# EAGLE board IRBeaconRev5 (EAGLE 6.4)
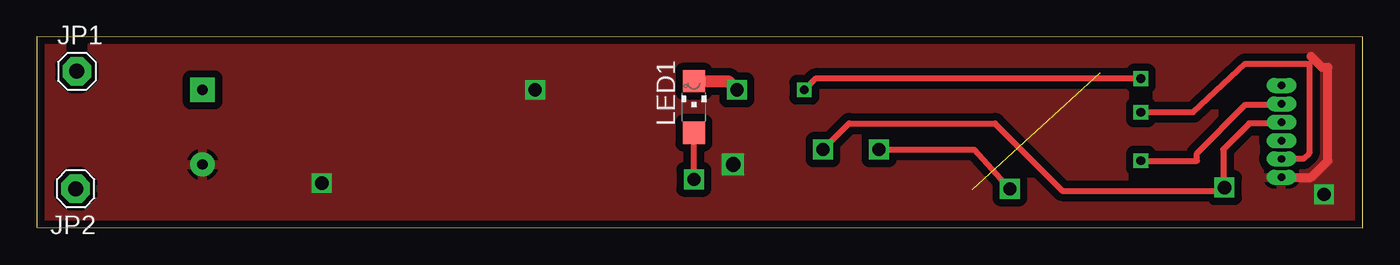
[diagram p0: board, top side]
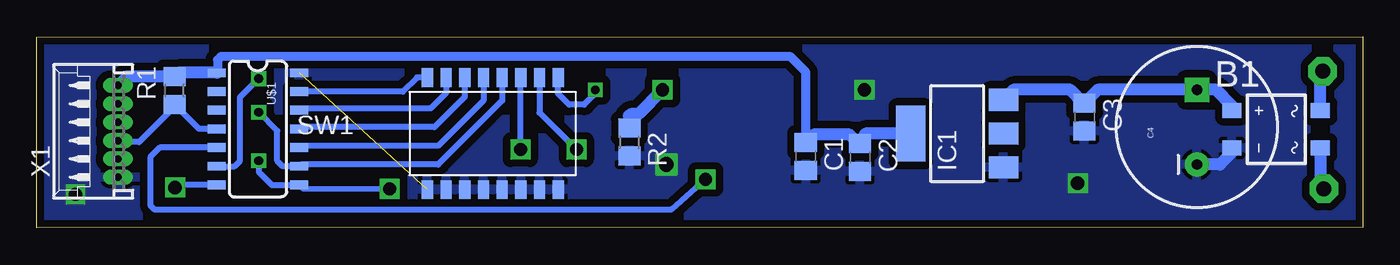
[diagram p1: board, bottom side, seen from below]

Size 90.05 x 13.01 mm. Coordinates in mm from the lower left corner, seen from the top.
Outline: 0,0.04 90.05,0 90.05,12.97 0,13.01 0,0.04
Copper layers (1*16): Top 0.035mm / dielectric 1.5mm / Bottom 0.035mm
Design rules "default *": minimum track width 10mil, minimum drill 24mil, track to track 8mil, track to pad 8mil, pad to pad 8mil, via to via 8mil, smd to smd 8mil, copper to edge 20mil, drill to drill 8mil, minimum pad ring 10mil, minimum via ring 8mil, stop-mask expansion 4mil, vias tented up to drill 0mil, thermal gap 10mil
Net classes: 0 default: width 0.508 mm, drill 0.508 mm, clearance 0.508 mm

## Footprints (pad centres in the part's own frame; a part is rotated, then mirrored left to right if it is on the bottom)
MBS = smd 1 x 1.3: + -1.27,-3; - 1.27,-3; AC1 -1.27,3; AC2 1.27,3
C0805 = smd 1.3 x 1.5: 1 -0.95,0; 2 0.95,0
CPOL-RADIAL-1000UF-25V = drill 0.7 pad 1.651 square: 1 2.54,0 | drill 0.7 pad 1.651: 2 -2.54,0
SOT223 = smd 1.5 x 2: 1 -2.3,-3.15; 2 0,-3.15; 3 2.3,-3.15 | smd 3.8 x 2: 4 0,3.15
1X01 = drill 1.016 pad 1.93 octagon: 1 0,0
CHIPLED_1206 = smd 1.5 x 1.5: A 0,-1.75; C 0,1.75
R0805 = smd 1.3 x 1.5: 1 -0.95,0; 2 0.95,0
416131160808 = smd 0.76 x 1.27: 1 0,-3.81; 2 1.27,-3.81; 3 2.54,-3.81; 4 3.81,-3.81; 5 5.08,-3.81; 6 6.35,-3.81; 7 7.62,-3.81; 8 8.89,-3.81; 9 8.89,3.81; 10 7.62,3.81; 11 6.35,3.81; 12 5.08,3.81; 13 3.81,3.81; 14 2.54,3.81; 15 1.27,3.81; 16 0,3.81
SO14 = smd 0.6 x 1.2: 1 -3.81,-2.8; 2 -2.54,-2.8; 3 -1.27,-2.8; 4 0,-2.8; 5 1.27,-2.8; 6 2.54,-2.8; 7 3.81,-2.8; 8 3.81,2.8; 9 2.54,2.8; 10 1.27,2.8; 11 0,2.8; 12 -1.27,2.8; 13 -2.54,2.8; 14 -3.81,2.8
53048-06 = drill 0.5 pad 0.698 long: 1 3.125,-1.25; 2 1.875,-1.25; 3 0.625,-1.25; 4 -0.625,-1.25; 5 -1.875,-1.25; 6 -3.125,-1.25

## Placement (x,y rotation side)
B1  B2S  [MBS]  5.88,6.72 270 bottom
C1  0.1uF  [C0805]  37.83,4.86 270 bottom
C2  10uF  [C0805]  34.14,4.79 270 bottom
C3  0.1uF  [C0805]  18.89,7.54 270 bottom
C4  [CPOL-RADIAL-1000UF-25V]  11.26,6.86 90 bottom
IC1  LD117AS33TR  [SOT223]  27.54,6.42 90 bottom
JP1  [1X01]  2.72,10.66 0 top
JP2  [1X01]  2.64,2.67 180 top
LED1  [CHIPLED_1206]  44.63,8.23 0 top
R1  10k  [R0805]  80.7,9.35 90 bottom
R2  [R0805]  49.81,5.84 270 bottom
SW1  416131160808  [416131160808]  63.53,6.43 0 bottom
U$1  ATTINY84  [SO14]  75.03,6.74 270 bottom
X1  53048-06  [53048-06]  85.78,6.57 90 bottom

## Library data of the parts
B1 = rectifier
C1-C3 R1 R2 = rcl
C4 = SparkFun-Capacitors
IC1 = v-reg
JP1 JP2 LED1 = adafruit
SW1 = DipSchalter
U$1 = SparkFun-DigitalIC
X1 = con-molex; MF: WALDOM/MOLEX; MPN: 53048-0610; OC_FARNELL: 1012260; OC_NEWARK: 38C9911

## Nets
GND: B1.- C1.2 C2.2 C3.2 C4.2 IC1.1 R2.2 SW1.1 SW1.2 SW1.3 SW1.4 SW1.5 SW1.6 SW1.7 SW1.8 U$1.14 X1.6
N$1: R1.1 U$1.4 X1.4
N$2: B1.AC2 JP2.1
N$3: B1.+ C3.1 C4.1 IC1.3
N$4: SW1.15 U$1.12
N$5: SW1.14 U$1.11
N$6: SW1.13 U$1.10
N$7: LED1.A U$1.5
N$8: SW1.12 U$1.9 X1.5
N$10: SW1.10 U$1.7 X1.3
N$11: SW1.9 U$1.6
N$12: SW1.16 U$1.13
N$13: LED1.C R2.1
N$14: SW1.11 U$1.8 X1.2
RAIL_A: B1.AC1 JP1.1
VCC: C1.1 C2.1 IC1.4 R1.2 U$1.1 X1.1

## Tracks (layer width: path | path; a pad name or v marks a point on that pad's centre or on a via)
GND  (via drill 0.9, 1)  (1 unrouted)
  Top 0.61: X1.6 86.55,3.45 87.68,4.57 87.68,10.92 87.3,10.92 86.54,11.68
  Bottom 0.813: B1.- 8.88,5.14 9.7,4.32 C4.2
  other vias: 47.29,4.32 87.43,2.29 33.83,9.4 19.35,3.05
  pour Top: -0.46,13.46 90.73,13.46 90.73,-0.51 -0.71,-0.51 -0.71,13.46
  pour Bottom: -0.2,13.72 90.73,13.72 90.73,-0.25 -0.46,-0.25 -0.46,13.97
N$1
  Bottom 0.406: U$1.4 79.04,6.74 R1.1 80.7,8.25 83.11,5.84 84.43,5.84 X1.4
N$2
  Bottom 0.813: B1.AC2 2.88,2.91 JP2.1
N$3
  Bottom 0.813: B1.+ 8.88,8.32 9.96,9.4 C4.1 17.99,9.4 C3.1 18.96,8.49 19.86,9.4 23.71,9.4 IC1.3
N$4
  Bottom 0.406: SW1.15 62.26,9.17 63.3,8.13 72.11,8.13 U$1.12
N$5
  Bottom 0.406: SW1.14 60.99,8.91 63.04,6.86 72.11,6.86 U$1.11
N$6
  Bottom 0.406: SW1.13 59.72,8.66 62.79,5.59 72.11,5.59 U$1.10
N$7  (via drill 0.9)
  Top 0.406: v44.63,3.3 LED1.A
  Bottom 0.406: U$1.5 81.7,5.47 82.35,4.83 82.35,1.52 82.09,1.27 46.91,1.27 v44.63,3.3
N$8  (via drill 0.6)
  Top 0.406: v74.98,7.87 78.54,7.87 82.09,11.18 86.41,11.18 86.41,5.08 86.03,4.7 X1.5
  Bottom 0.406: SW1.12 58.45,8.66 62.79,4.32 71.93,4.32 | 71.93,4.32 72.11,4.32 U$1.9 | U$1.9 72.05,4.2 71.93,4.32 | U$1.9 73.34,4.2 73.71,4.57 73.71,6.6 v74.98,7.87
N$10  (via drill 0.9)
  Top 0.406: v53.39,5.33 55.17,7.11 65.07,7.11 69.65,2.54 80.57,2.54 | 80.57,2.54 v80.66,2.75 | X1.3 84.45,7.11 82.35,7.11 80.57,5.33 80.57,2.85 v80.66,2.75 | v80.66,2.75 80.66,2.63 80.57,2.54
  Bottom 0.406: SW1.10 55.91,7.85 v53.39,5.33 | U$1.7 80.48,2.93 v80.66,2.75
N$11  (via drill 0.6)
  Top 0.406: v74.98,10.16 52.88,10.16 v52.12,9.4
  Bottom 0.406: U$1.6 76.62,4.2 76.25,4.57 76.25,8.89 v74.98,10.16 | v52.12,9.4 52.12,9.14 52.88,8.38 53.9,8.38 54.66,9.14 54.66,10.21 SW1.9
N$12
  Bottom 0.406: SW1.16 64.24,10.24 65.2,9.27 72.22,9.27 U$1.13
N$13  (via drill 0.9)
  Top 0.813: LED1.C 46.97,9.98 v47.55,9.4
  Bottom 0.813: v47.55,9.4 49.2,7.75 49.71,7.75 49.83,7.62 49.83,6.82 R2.1
N$14  (via drill 0.6, 0.9)
  Top 0.406: v57.2,5.33 63.68,5.33 v66.09,2.67 | v74.98,4.57 78.79,4.57 78.79,5.08 82.09,8.38 84.47,8.38 X1.2
  Bottom 0.406: v57.2,5.33 57.2,10.21 SW1.11 | v66.09,2.67 71.94,2.68 U$1.8 72.24,2.92 74.09,2.92 74.98,3.81 v74.98,4.57
RAIL_A
  Bottom 0.813: B1.AC1 2.88,10.5 JP1.1
VCC
  Bottom 0.61: C1.1 37.83,10.6 38.91,11.68 77.52,11.68 77.77,11.43 77.77,10.61 U$1.1
  Bottom 0.813: IC1.4 33.77,6.42 33.83,6.35 33.83,6.04 C2.1 34.24,5.74 34.85,6.35 37.29,6.35 C1.1 | U$1.1 80.45,10.55 R1.2 83.93,10.3 X1.1